# EAGLE board Uhr3r4_1_duo (EAGLE 7.6.0)
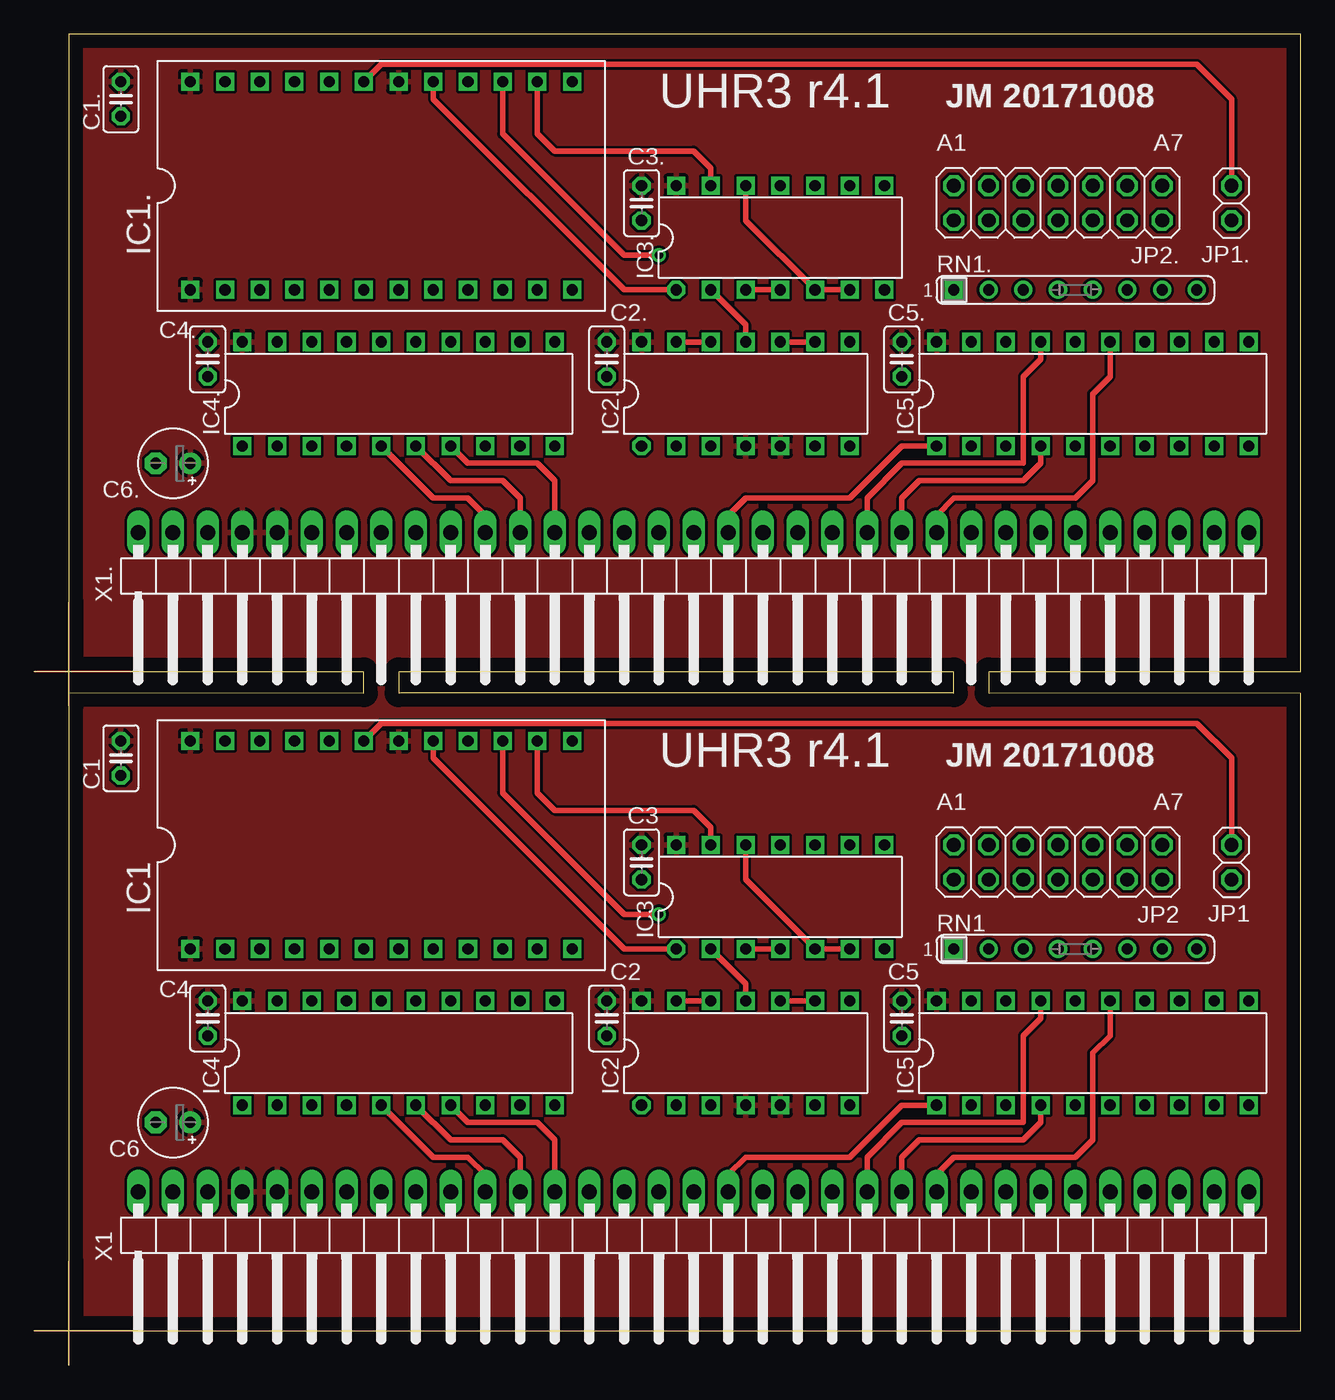
[diagram p0: board, top side]
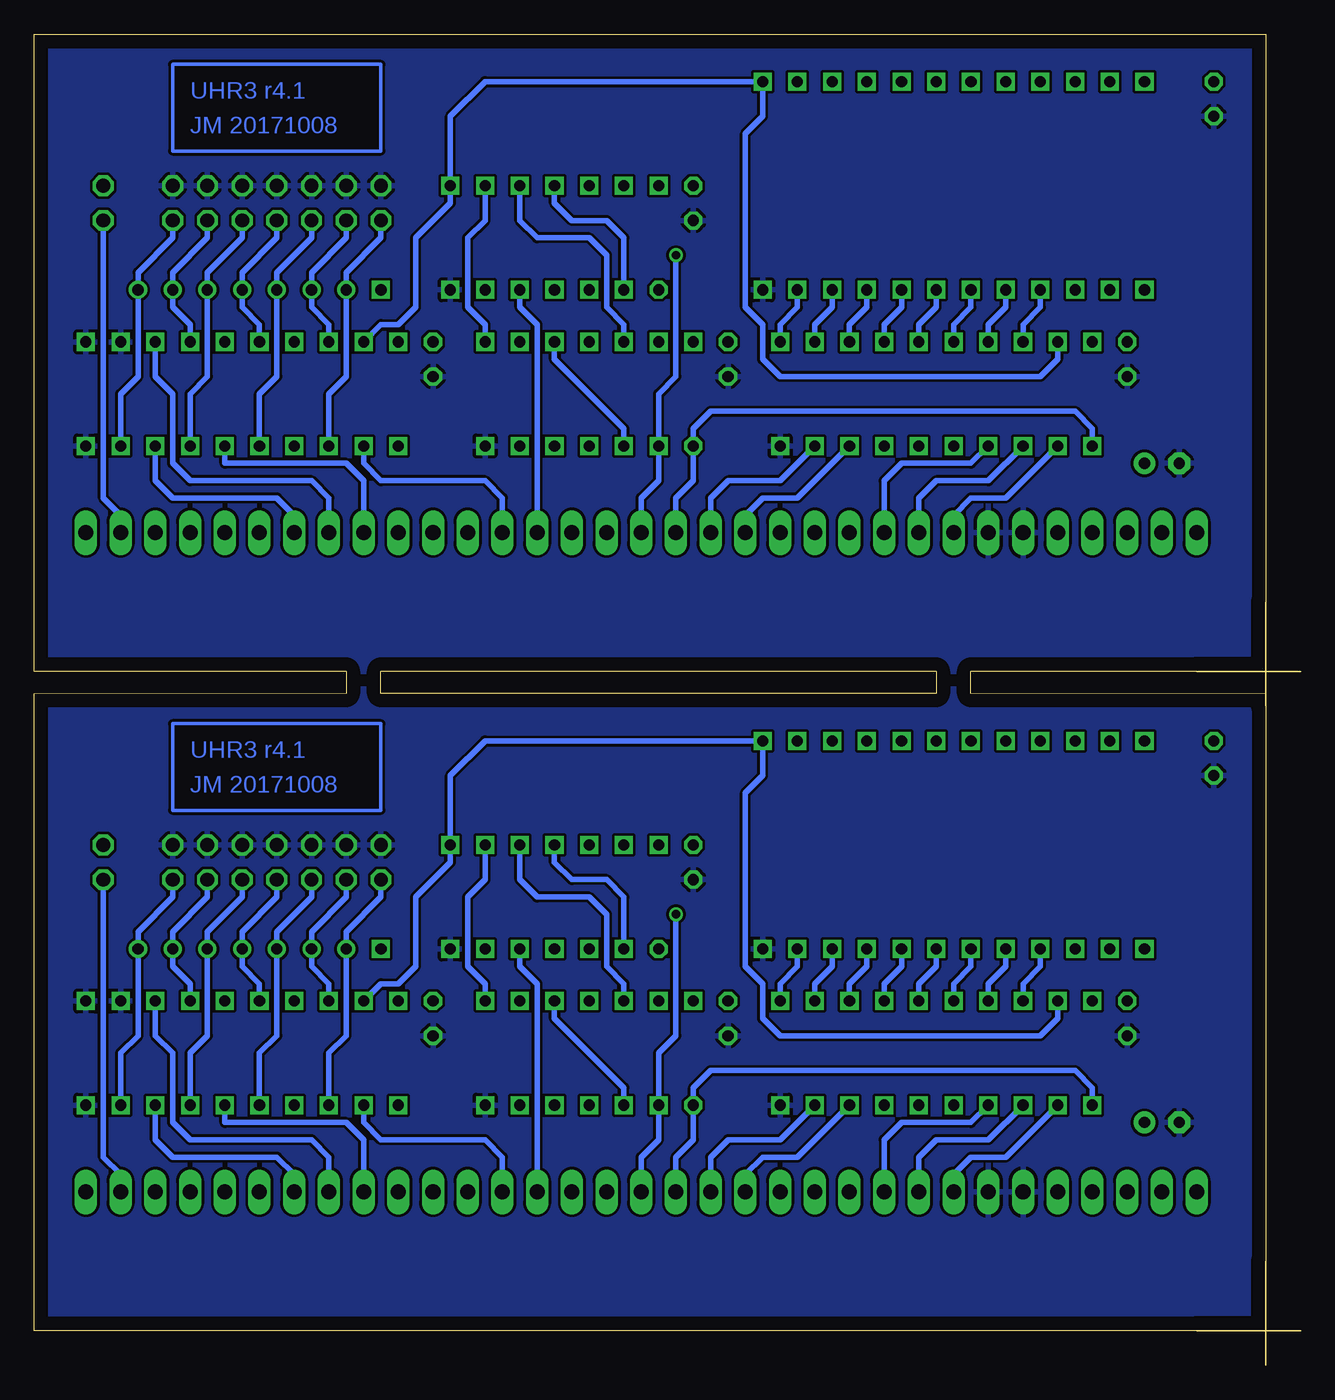
[diagram p1: board, bottom side, seen from below]

Size 92.69 x 97.46 mm. Coordinates in mm from the lower left corner, seen from the top.
Outline: 69.85,49.21 92.69,49.2 92.69,2.54 2.54,2.54 2.54,49.2 24.13,49.21
Outline: 69.85,49.21 69.85,49.2
Outline: 67.31,49.2 67.31,49.21
Outline: 67.31,49.21 26.67,49.21
Outline: 26.67,49.21 26.67,49.2
Outline: 24.13,49.2 24.13,49.21
Outline: 26.67,49.21 26.67,50.8 67.31,50.8 67.31,49.21
Outline: 24.13,49.21 24.13,50.8 2.54,50.8 2.54,97.46 92.69,97.46 92.69,50.8 69.85,50.8 69.85,49.21
Copper layers (1*16): Top 0.035mm / dielectric 1.5mm / Bottom 0.035mm
Design rules "default": minimum track width 10mil, minimum drill 24mil, track to track 8mil, track to pad 8mil, pad to pad 8mil, via to via 8mil, smd to smd 8mil, copper to edge 40mil, drill to drill 8mil, minimum pad ring 10mil, minimum via ring 8mil, stop-mask expansion 4mil, vias tented up to drill 0mil, thermal gap 10mil
Net classes: 0 default: width 0.406 mm; 1 supp: width 0.406 mm

## Footprints (pad centres in the part's own frame; a part is rotated, then mirrored left to right if it is on the bottom)
C025-025X050 = drill 0.813 octagon: 1 -1.27,0; 2 1.27,0
E2,5-5 = drill 0.813 pad 1.6: + -1.27,0 | drill 0.813 pad 1.6 octagon: - 1.27,0
DIL24-6_DS = drill 0.813 square: 1 -13.97,-7.62; 2 -11.43,-7.62; 3 -8.89,-7.62; 4 -6.35,-7.62; 5 -3.81,-7.62; 6 -1.27,-7.62; 7 1.27,-7.62; 8 3.81,-7.62; 9 6.35,-7.62; 10 8.89,-7.62; 11 11.43,-7.62; 12 13.97,-7.62; 13 13.97,7.62; 14 11.43,7.62; 15 8.89,7.62; 16 6.35,7.62; 17 3.81,7.62; 18 1.27,7.62; 19 -1.27,7.62; 20 -3.81,7.62; 21 -6.35,7.62; 22 -8.89,7.62; 23 -11.43,7.62; 24 -13.97,7.62
DIL14 = drill 0.813 octagon: 1 -7.62,-3.81 | drill 0.813 square: 2 -5.08,-3.81; 3 -2.54,-3.81; 4 0,-3.81; 5 2.54,-3.81; 6 5.08,-3.81; 7 7.62,-3.81; 8 7.62,3.81; 9 5.08,3.81; 10 2.54,3.81; 11 0,3.81; 12 -2.54,3.81; 13 -5.08,3.81; 14 -7.62,3.81
DIL20 = drill 0.813 square: 1 -11.43,-3.81; 2 -8.89,-3.81; 3 -6.35,-3.81; 4 -3.81,-3.81; 5 -1.27,-3.81; 6 1.27,-3.81; 7 3.81,-3.81; 8 6.35,-3.81; 9 8.89,-3.81; 10 11.43,-3.81; 11 11.43,3.81; 12 8.89,3.81; 13 6.35,3.81; 14 3.81,3.81; 15 1.27,3.81; 16 -1.27,3.81; 17 -3.81,3.81; 18 -6.35,3.81; 19 -8.89,3.81; 20 -11.43,3.81
1X02 = drill 1.016 octagon: 1 -1.27,0; 2 1.27,0
2X07 = drill 1.016 octagon: 1 -7.62,-1.27; 2 -7.62,1.27; 3 -5.08,-1.27; 4 -5.08,1.27; 5 -2.54,-1.27; 6 -2.54,1.27; 7 0,-1.27; 8 0,1.27; 9 2.54,-1.27; 10 2.54,1.27; 11 5.08,-1.27; 12 5.08,1.27; 13 7.62,-1.27; 14 7.62,1.27
SIL8 = drill 0.813 square: 1 -8.89,0 | drill 0.813: 2 -6.35,0; 3 -3.81,0; 4 -1.27,0; 5 1.27,0; 6 3.81,0; 7 6.35,0; 8 8.89,0
1X33/90_PCB = drill 1.1 pad 1.524 long: 1A -38.1,3.81; 2A -35.56,3.81; 3A -33.02,3.81; 4A -30.48,3.81; 5A -27.94,3.81; 6A -25.4,3.81; 7A -22.86,3.81; 8A -20.32,3.81; 9A -17.78,3.81; 10A -15.24,3.81; 11A -12.7,3.81; 12A -10.16,3.81; 13A -7.62,3.81; 14A -5.08,3.81; 15A -2.54,3.81; 16A 0,3.81; 17A 2.54,3.81; 18A 5.08,3.81; 19A 7.62,3.81; 20A 10.16,3.81; 21A 12.7,3.81; 22A 15.24,3.81; 23A 17.78,3.81; 24A 20.32,3.81; 25A 22.86,3.81; 26A 25.4,3.81; 27A 27.94,3.81; 28A 30.48,3.81; 29A 33.02,3.81; 30A 35.56,3.81; 31A 38.1,3.81; 32A 40.64,3.81; 33A 43.18,3.81

## Placement (x,y rotation side)
C1  100n  [C025-025X050]  6.35,44.45 90 top
C1.  100n  [C025-025X050]  6.35,92.71 90 top
C2  100n  [C025-025X050]  41.91,25.4 90 top
C2.  100n  [C025-025X050]  41.91,73.66 90 top
C3  100n  [C025-025X050]  44.45,36.83 90 top
C3.  100n  [C025-025X050]  44.45,85.09 90 top
C4  100n  [C025-025X050]  12.7,25.4 90 top
C4.  100n  [C025-025X050]  12.7,73.66 90 top
C5  100n  [C025-025X050]  63.5,25.4 90 top
C5.  100n  [C025-025X050]  63.5,73.66 90 top
C6  10µ  [E2,5-5]  10.16,17.78 180 top
C6.  10µ  [E2,5-5]  10.16,66.04 180 top
IC1  DS12887A  [DIL24-6_DS]  25.4,38.1 0 top
IC1.  DS12887A  [DIL24-6_DS]  25.4,86.36 0 top
IC2  74LS00N  [DIL14]  52.07,22.86 0 top
IC2.  74LS00N  [DIL14]  52.07,71.12 0 top
IC3  74LS02N  [DIL14]  54.61,34.29 0 top
IC3.  74LS02N  [DIL14]  54.61,82.55 0 top
IC4  74LS245N  [DIL20]  26.67,22.86 0 top
IC4.  74LS245N  [DIL20]  26.67,71.12 0 top
IC5  74LS688N  [DIL20]  77.47,22.86 0 top
IC5.  74LS688N  [DIL20]  77.47,71.12 0 top
JP1  /INT  [1X02]  87.63,36.83 90 top
JP1.  /INT  [1X02]  87.63,85.09 90 top
JP2  [2X07]  74.93,36.83 180 top
JP2.  [2X07]  74.93,85.09 180 top
RN1  3k3  [SIL8]  76.2,30.48 0 top
RN1.  3k3  [SIL8]  76.2,78.74 0 top
X1  NKC_IO  [1X33/90_PCB]  45.72,8.89 0 top
X1.  NKC_IO  [1X33/90_PCB]  45.72,57.15 0 top

## Library data of the parts
C1 C1. C2 C2. C3 C3. C4 C4. C5 C5. = rcl
C6 C6. = resistor
IC1 IC1. X1 X1. = $eigene
IC2 IC2. IC3 IC3. IC4 IC4. IC5 IC5. = 74xx-eu
JP1 JP1. JP2 JP2. = pinhead
RN1 RN1. = resistor-sil; OC_FARNELL: unknown; OC_NEWARK: unknown

## Nets
+12V: X1.2A
+12V1: X1..2A
-5V: X1.1A
-5V1: X1..1A
-12V: X1.3A
-12V1: X1..3A
/INT: JP1.1 X1.32A
/INT1: JP1..1 X1..32A
GND [supp]: C1.1 C2.1 C3.1 C4.1 C5.1 C6.- IC1.12 IC2.7 IC3.7 IC4.10 IC5.10 IC5.11 IC5.12 JP2.1 JP2.3 JP2.5 JP2.7 JP2.9 JP2.11 JP2.13 X1.6A X1.7A
GND1 [supp]: C1..1 C2..1 C3..1 C4..1 C5..1 C6..- IC1..12 IC2..7 IC3..7 IC4..10 IC5..10 IC5..11 IC5..12 JP2..1 JP2..3 JP2..5 JP2..7 JP2..9 JP2..11 JP2..13 X1..6A X1..7A
N$1: IC4.2 X1.8A
N$2: IC4.3 X1.9A
N$3: IC4.4 X1.10A
N$4: IC4.5 X1.11A
N$5: IC4.6 X1.12A
N$6: IC4.7 X1.13A
N$7: IC4.8 X1.14A
N$8: IC4.9 X1.15A
N$9: IC1.4 IC4.18
N$10: IC1.5 IC4.17
N$11: IC1.6 IC4.16
N$12: IC1.7 IC4.15
N$13: IC1.8 IC4.14
N$14: IC1.9 IC4.13
N$15: IC1.10 IC4.12
N$16: IC1.11 IC4.11
N$17: IC1.15 IC2.2 X1.17A
N$18: IC5.3 JP2.14 RN1.2
N$19: IC5.18 JP2.12 RN1.3
N$20: IC5.5 JP2.10 RN1.4
N$21: IC5.16 JP2.8 RN1.5
N$22: IC5.7 JP2.6 RN1.6
N$23: IC5.14 JP2.4 RN1.7
N$24: IC5.9 JP2.2 RN1.8
N$25: IC5.2 X1.21A
N$26: IC5.17 X1.22A
N$27: IC5.4 X1.23A
N$28: IC5.15 X1.24A
N$29: IC5.6 X1.25A
N$30: IC5.13 X1.26A
N$31: IC5.8 X1.27A
N$32: IC2.1 IC4.1 X1.16A
N$33: IC1.19 JP1.2
N$34: IC2.3 IC2.9 IC2.10
N$35: IC2.8 IC3.9
N$36: IC1.13 IC3.8 IC4.19 IC5.19
N$37: IC2.12 IC2.13 IC3.10
N$38: IC3.5 IC3.6 IC3.12 X1.20A
N$39: IC2.11 IC3.2 IC3.11
N$40: IC3.3 IC3.4
N$42: IC1.14 IC3.13
N$43: IC1.17 IC3.1
N$44: IC4..2 X1..8A
N$45: IC5.1 X1.18A
N$46: IC4..3 X1..9A
N$47: IC4..4 X1..10A
N$48: IC4..5 X1..11A
N$49: IC4..6 X1..12A
N$50: IC4..7 X1..13A
N$51: IC4..8 X1..14A
N$52: IC4..9 X1..15A
N$53: IC1..4 IC4..18
N$54: IC1..5 IC4..17
N$55: IC1..6 IC4..16
N$56: IC1..7 IC4..15
N$57: IC1..8 IC4..14
N$58: IC1..9 IC4..13
N$59: IC1..10 IC4..12
N$60: IC1..11 IC4..11
N$61: IC5..3 JP2..14 RN1..2
N$62: IC5..5 JP2..10 RN1..4
N$63: IC5..16 JP2..8 RN1..5
N$64: IC5..7 JP2..6 RN1..6
N$65: IC5..14 JP2..4 RN1..7
N$66: IC5..9 JP2..2 RN1..8
N$67: IC5..2 X1..21A
N$68: IC5..17 X1..22A
N$69: IC5..4 X1..23A
N$70: IC5..15 X1..24A
N$71: IC5..6 X1..25A
N$72: IC5..13 X1..26A
N$73: IC5..8 X1..27A
N$74: IC1..15 IC2..2 X1..17A
N$75: IC2..1 IC4..1 X1..16A
N$76: IC2..3 IC2..9 IC2..10
N$77: IC2..8 IC3..9
N$78: IC1..13 IC3..8 IC4..19 IC5..19
N$79: IC2..12 IC2..13 IC3..10
N$80: IC3..5 IC3..6 IC3..12 X1..20A
N$81: IC2..11 IC3..2 IC3..11
N$82: IC3..3 IC3..4
N$83: IC1..14 IC3..13
N$84: IC1..17 IC3..1
N$85: IC5..1 X1..18A
N$86: IC5..18 JP2..12 RN1..3
N$87: IC1..19 JP1..2
VCC [supp]: C1.2 C2.2 C3.2 C4.2 C5.2 C6.+ IC1.1 IC1.18 IC1.24 IC2.4 IC2.5 IC2.14 IC3.14 IC4.20 IC5.20 RN1.1 X1.4A X1.5A
VCC1 [supp]: C1..2 C2..2 C3..2 C4..2 C5..2 C6..+ IC1..1 IC1..18 IC1..24 IC2..4 IC2..5 IC2..14 IC3..14 IC4..20 IC5..20 RN1..1 X1..4A X1..5A

## Tracks (layer width: path | path; a pad name or v marks a point on that pad's centre or on a via)
/INT
  Bottom 0.406: X1.32A 86.36,13.97 87.63,15.24 JP1.1
/INT1
  Bottom 0.406: X1..32A 86.36,62.23 87.63,63.5 JP1..1
GND
  pour Bottom: 2.54,2.54 92.71,2.54 92.71,49.53 2.54,49.53
GND1
  pour Bottom: 2.54,50.8 92.71,50.8 92.71,97.79 2.54,97.79
N$1
  Bottom 0.406: IC4.2 21.59,15.24 24.13,15.24 25.4,13.97 X1.8A
N$2
  Bottom 0.406: IC4.3 22.86,16.51 26.67,16.51 27.94,15.24 X1.9A
N$3
  Bottom 0.406: IC4.4 24.13,17.78 29.21,17.78 30.48,16.51 X1.10A
N$4
  Top 0.406: IC4.5 29.21,15.24 31.75,15.24 33.02,13.97 X1.11A
N$5
  Top 0.406: IC4.6 30.48,16.51 34.29,16.51 35.56,15.24 X1.12A
N$6
  Top 0.406: IC4.7 31.75,17.78 36.83,17.78 38.1,16.51 X1.13A
N$7
  Bottom 0.406: IC4.8 36.83,15.24 39.37,15.24 40.64,13.97 X1.14A
N$8
  Bottom 0.406: IC4.9 38.1,16.51 41.91,16.51 43.18,15.24 X1.15A
N$9
  Bottom 0.406: IC4.18 20.32,27.94 19.05,29.21 IC1.4
N$10
  Bottom 0.406: IC4.17 22.86,27.94 21.59,29.21 IC1.5
N$11
  Bottom 0.406: IC4.16 25.4,27.94 24.13,29.21 IC1.6
N$12
  Bottom 0.406: IC4.15 27.94,27.94 26.67,29.21 IC1.7
N$13
  Bottom 0.406: IC4.14 30.48,27.94 29.21,29.21 IC1.8
N$14
  Bottom 0.406: IC4.13 33.02,27.94 31.75,29.21 IC1.9
N$15
  Bottom 0.406: IC4.12 35.56,27.94 34.29,29.21 IC1.10
N$16
  Bottom 0.406: IC4.11 38.1,27.94 36.83,29.21 IC1.11
N$17  (via drill 0.61)
  Top 0.406: IC1.15 34.29,41.91 43.18,33.02 v45.72,33.02
  Bottom 0.406: X1.17A 48.26,15.24 46.99,16.51 IC2.2 46.99,22.86 45.72,24.13 v45.72,33.02
N$18
  Bottom 0.406: JP2.14 67.31,34.29 69.85,31.75 RN1.2 69.85,24.13 71.12,22.86 IC5.3
N$19
  Bottom 0.406: IC5.18 71.12,27.94 72.39,29.21 RN1.3 72.39,31.75 69.85,34.29 JP2.12
N$20
  Bottom 0.406: IC5.5 76.2,22.86 74.93,24.13 RN1.4 74.93,31.75 72.39,34.29 JP2.10
N$21
  Bottom 0.406: IC5.16 76.2,27.94 77.47,29.21 RN1.5 77.47,31.75 74.93,34.29 JP2.8
N$22
  Bottom 0.406: IC5.7 81.28,22.86 80.01,24.13 RN1.6 80.01,31.75 77.47,34.29 JP2.6
N$23
  Bottom 0.406: IC5.14 81.28,27.94 82.55,29.21 RN1.7 82.55,31.75 80.01,34.29 JP2.4
N$24
  Bottom 0.406: IC5.9 86.36,22.86 85.09,24.13 RN1.8 85.09,31.75 82.55,34.29 JP2.2
N$25
  Bottom 0.406: X1.21A 58.42,15.24 59.69,16.51 67.31,16.51 68.58,17.78 IC5.2
N$26
  Top 0.406: IC5.17 73.66,25.4 72.39,24.13 72.39,17.78 63.5,17.78 60.96,15.24 X1.22A
N$27
  Top 0.406: X1.23A 63.5,15.24 64.77,16.51 72.39,16.51 73.66,17.78 IC5.4
N$28
  Top 0.406: X1.24A 66.04,13.97 67.31,15.24 76.2,15.24 77.47,16.51 77.47,22.86 78.74,24.13 IC5.15
N$29
  Bottom 0.406: X1.25A 68.58,16.51 69.85,17.78 78.74,17.78 IC5.6
N$30
  Bottom 0.406: X1.26A 71.12,15.24 72.39,16.51 81.28,16.51 82.55,17.78 82.55,22.86 83.82,24.13 IC5.13
N$31
  Bottom 0.406: X1.27A 73.66,13.97 74.93,15.24 82.55,15.24 83.82,16.51 IC5.8
N$32
  Bottom 0.406: X1.16A 45.72,15.24 44.45,16.51 IC2.1 44.45,20.32 43.18,21.59 16.51,21.59 15.24,20.32 IC4.1
N$33
  Top 0.406: IC1.19 25.4,46.99 85.09,46.99 87.63,44.45 JP1.2
N$34
  Top 0.406: IC2.10 IC2.9
  Bottom 0.406: IC2.3 49.53,20.32 54.61,25.4 IC2.10
N$35
  Bottom 0.406: IC2.8 59.69,27.94 60.96,29.21 60.96,34.29 59.69,35.56 IC3.9
N$36
  Bottom 0.406: IC5.19 67.31,27.94 66.04,27.94 64.77,29.21 64.77,34.29 62.23,36.83 IC3.8 62.23,43.18 59.69,45.72 IC1.13 39.37,43.18 40.64,41.91 40.64,29.21 39.37,27.94 39.37,25.4 38.1,24.13 19.05,24.13 17.78,25.4 IC4.19
N$37
  Top 0.406: IC2.13 IC2.12
  Bottom 0.406: IC2.12 49.53,27.94 50.8,29.21 50.8,33.02 52.07,34.29 55.88,34.29 57.15,35.56 IC3.10
N$38
  Top 0.406: IC3.6 IC3.5 52.07,35.56 IC3.12
  Bottom 0.406: X1.20A 55.88,27.94 57.15,29.21 IC3.5
N$39
  Top 0.406: IC3.2 52.07,27.94 IC2.11
  Bottom 0.406: IC3.2 49.53,34.29 50.8,35.56 53.34,35.56 54.61,36.83 IC3.11
N$40
  Top 0.406: IC3.4 IC3.3
N$41
  Bottom 0.254: 67.31,46.99 82.55,46.99 82.55,40.64 67.31,40.64 67.31,46.99
N$42
  Top 0.406: IC1.14 36.83,41.91 38.1,40.64 48.26,40.64 49.53,39.37 IC3.13
N$43
  Top 0.406: IC1.17 29.21,44.45 43.18,30.48 IC3.1
N$44
  Bottom 0.406: IC4..2 21.59,63.5 24.13,63.5 25.4,62.23 X1..8A
N$45
  Top 0.406: X1.18A 50.8,13.97 52.07,15.24 59.69,15.24 63.5,19.05 IC5.1
N$46
  Bottom 0.406: IC4..3 22.86,64.77 26.67,64.77 27.94,63.5 X1..9A
N$47
  Bottom 0.406: IC4..4 24.13,66.04 29.21,66.04 30.48,64.77 X1..10A
N$48
  Top 0.406: IC4..5 29.21,63.5 31.75,63.5 33.02,62.23 X1..11A
N$49
  Top 0.406: IC4..6 30.48,64.77 34.29,64.77 35.56,63.5 X1..12A
N$50
  Top 0.406: IC4..7 31.75,66.04 36.83,66.04 38.1,64.77 X1..13A
N$51
  Bottom 0.406: IC4..8 36.83,63.5 39.37,63.5 40.64,62.23 X1..14A
N$52
  Bottom 0.406: IC4..9 38.1,64.77 41.91,64.77 43.18,63.5 X1..15A
N$53
  Bottom 0.406: IC4..18 20.32,76.2 19.05,77.47 IC1..4
N$54
  Bottom 0.406: IC4..17 22.86,76.2 21.59,77.47 IC1..5
N$55
  Bottom 0.406: IC4..16 25.4,76.2 24.13,77.47 IC1..6
N$56
  Bottom 0.406: IC4..15 27.94,76.2 26.67,77.47 IC1..7
N$57
  Bottom 0.406: IC4..14 30.48,76.2 29.21,77.47 IC1..8
N$58
  Bottom 0.406: IC4..13 33.02,76.2 31.75,77.47 IC1..9
N$59
  Bottom 0.406: IC4..12 35.56,76.2 34.29,77.47 IC1..10
N$60
  Bottom 0.406: IC4..11 38.1,76.2 36.83,77.47 IC1..11
N$61
  Bottom 0.406: JP2..14 67.31,82.55 69.85,80.01 RN1..2 69.85,72.39 71.12,71.12 IC5..3
N$62
  Bottom 0.406: IC5..5 76.2,71.12 74.93,72.39 RN1..4 74.93,80.01 72.39,82.55 JP2..10
N$63
  Bottom 0.406: IC5..16 76.2,76.2 77.47,77.47 RN1..5 77.47,80.01 74.93,82.55 JP2..8
N$64
  Bottom 0.406: IC5..7 81.28,71.12 80.01,72.39 RN1..6 80.01,80.01 77.47,82.55 JP2..6
N$65
  Bottom 0.406: IC5..14 81.28,76.2 82.55,77.47 RN1..7 82.55,80.01 80.01,82.55 JP2..4
N$66
  Bottom 0.406: IC5..9 86.36,71.12 85.09,72.39 RN1..8 85.09,80.01 82.55,82.55 JP2..2
N$67
  Bottom 0.406: X1..21A 58.42,63.5 59.69,64.77 67.31,64.77 68.58,66.04 IC5..2
N$68
  Top 0.406: IC5..17 73.66,73.66 72.39,72.39 72.39,66.04 63.5,66.04 60.96,63.5 X1..22A
N$69
  Top 0.406: X1..23A 63.5,63.5 64.77,64.77 72.39,64.77 73.66,66.04 IC5..4
N$70
  Top 0.406: X1..24A 66.04,62.23 67.31,63.5 76.2,63.5 77.47,64.77 77.47,71.12 78.74,72.39 IC5..15
N$71
  Bottom 0.406: X1..25A 68.58,64.77 69.85,66.04 78.74,66.04 IC5..6
N$72
  Bottom 0.406: X1..26A 71.12,63.5 72.39,64.77 81.28,64.77 82.55,66.04 82.55,71.12 83.82,72.39 IC5..13
N$73
  Bottom 0.406: X1..27A 73.66,62.23 74.93,63.5 82.55,63.5 83.82,64.77 IC5..8
N$74  (via drill 0.61)
  Top 0.406: IC1..15 34.29,90.17 43.18,81.28 v45.72,81.28
  Bottom 0.406: X1..17A 48.26,63.5 46.99,64.77 IC2..2 46.99,71.12 45.72,72.39 v45.72,81.28
N$75
  Bottom 0.406: X1..16A 45.72,63.5 44.45,64.77 IC2..1 44.45,68.58 43.18,69.85 16.51,69.85 15.24,68.58 IC4..1
N$76
  Top 0.406: IC2..10 IC2..9
  Bottom 0.406: IC2..3 49.53,68.58 54.61,73.66 IC2..10
N$77
  Bottom 0.406: IC2..8 59.69,76.2 60.96,77.47 60.96,82.55 59.69,83.82 IC3..9
N$78
  Bottom 0.406: IC5..19 67.31,76.2 66.04,76.2 64.77,77.47 64.77,82.55 62.23,85.09 IC3..8 62.23,91.44 59.69,93.98 IC1..13 39.37,91.44 40.64,90.17 40.64,77.47 39.37,76.2 39.37,73.66 38.1,72.39 19.05,72.39 17.78,73.66 IC4..19
N$79
  Top 0.406: IC2..13 IC2..12
  Bottom 0.406: IC2..12 49.53,76.2 50.8,77.47 50.8,81.28 52.07,82.55 55.88,82.55 57.15,83.82 IC3..10
N$80
  Top 0.406: IC3..6 IC3..5 52.07,83.82 IC3..12
  Bottom 0.406: X1..20A 55.88,76.2 57.15,77.47 IC3..5
N$81
  Top 0.406: IC3..2 52.07,76.2 IC2..11
  Bottom 0.406: IC3..2 49.53,82.55 50.8,83.82 53.34,83.82 54.61,85.09 IC3..11
N$82
  Top 0.406: IC3..4 IC3..3
N$83
  Top 0.406: IC1..14 36.83,90.17 38.1,88.9 48.26,88.9 49.53,87.63 IC3..13
N$84
  Top 0.406: IC1..17 29.21,92.71 43.18,78.74 IC3..1
N$85
  Top 0.406: X1..18A 50.8,62.23 52.07,63.5 59.69,63.5 63.5,67.31 IC5..1
N$86
  Bottom 0.406: IC5..18 71.12,76.2 72.39,77.47 RN1..3 72.39,80.01 69.85,82.55 JP2..12
N$87
  Top 0.406: IC1..19 25.4,95.25 85.09,95.25 87.63,92.71 JP1..2
N$88
  Bottom 0.254: 67.31,95.25 82.55,95.25 82.55,88.9 67.31,88.9 67.31,95.25
VCC
  pour Top: 2.54,2.54 92.71,2.54 92.71,49.53 2.54,49.53
VCC1
  pour Top: 2.54,50.8 92.71,50.8 92.71,97.79 2.54,97.79

## Text on the board
Bottom: UHR3 r4.1 | JM 20171008 | UHR3 r4.1 | JM 20171008
tNames: UHR3 r4.1 | JM 20171008 | A1 | A7 | UHR3 r4.1 | JM 20171008 | A1 | A7